# EAGLE board seal belajar (EAGLE 9.5.0)
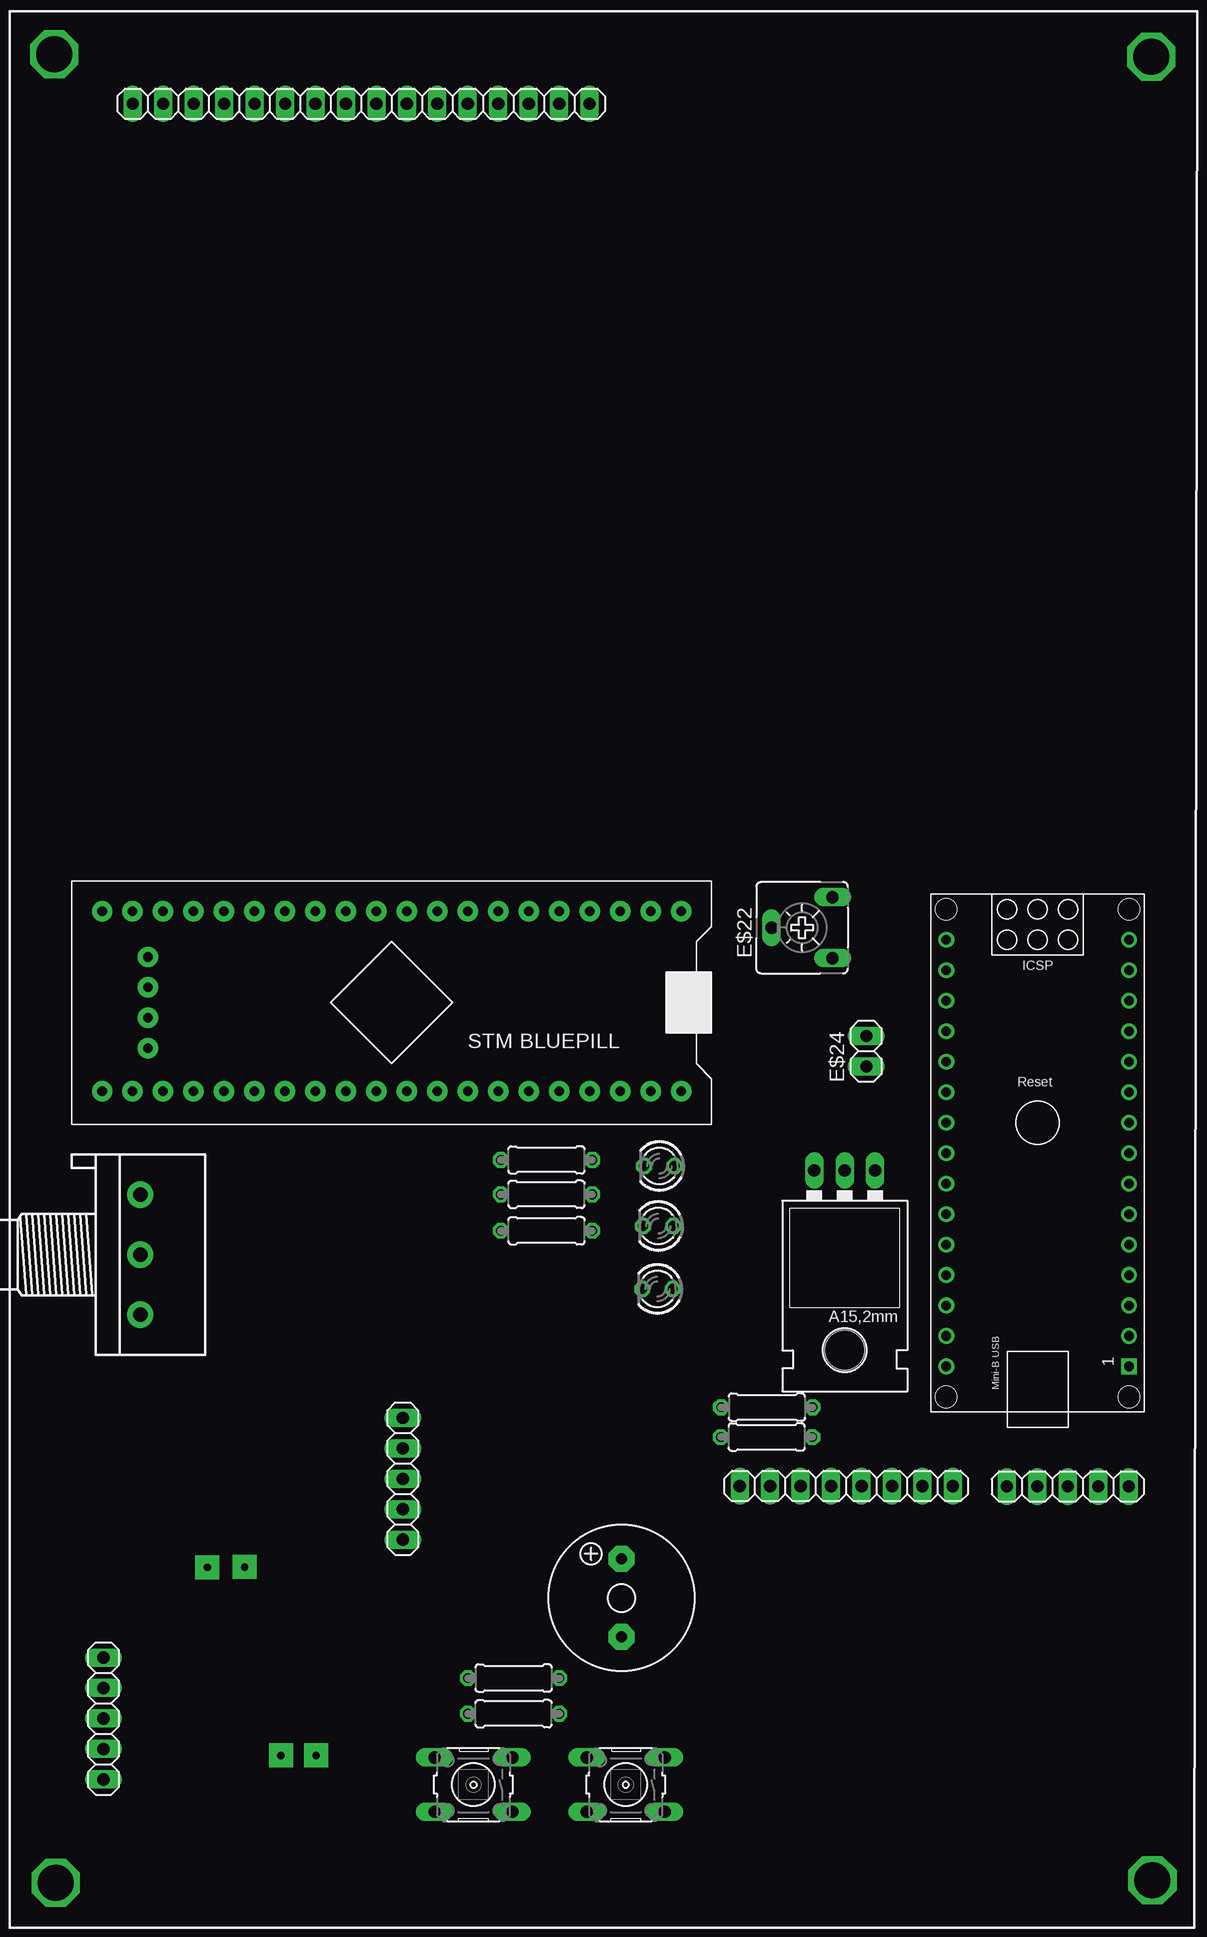
[diagram p0: board, top side]
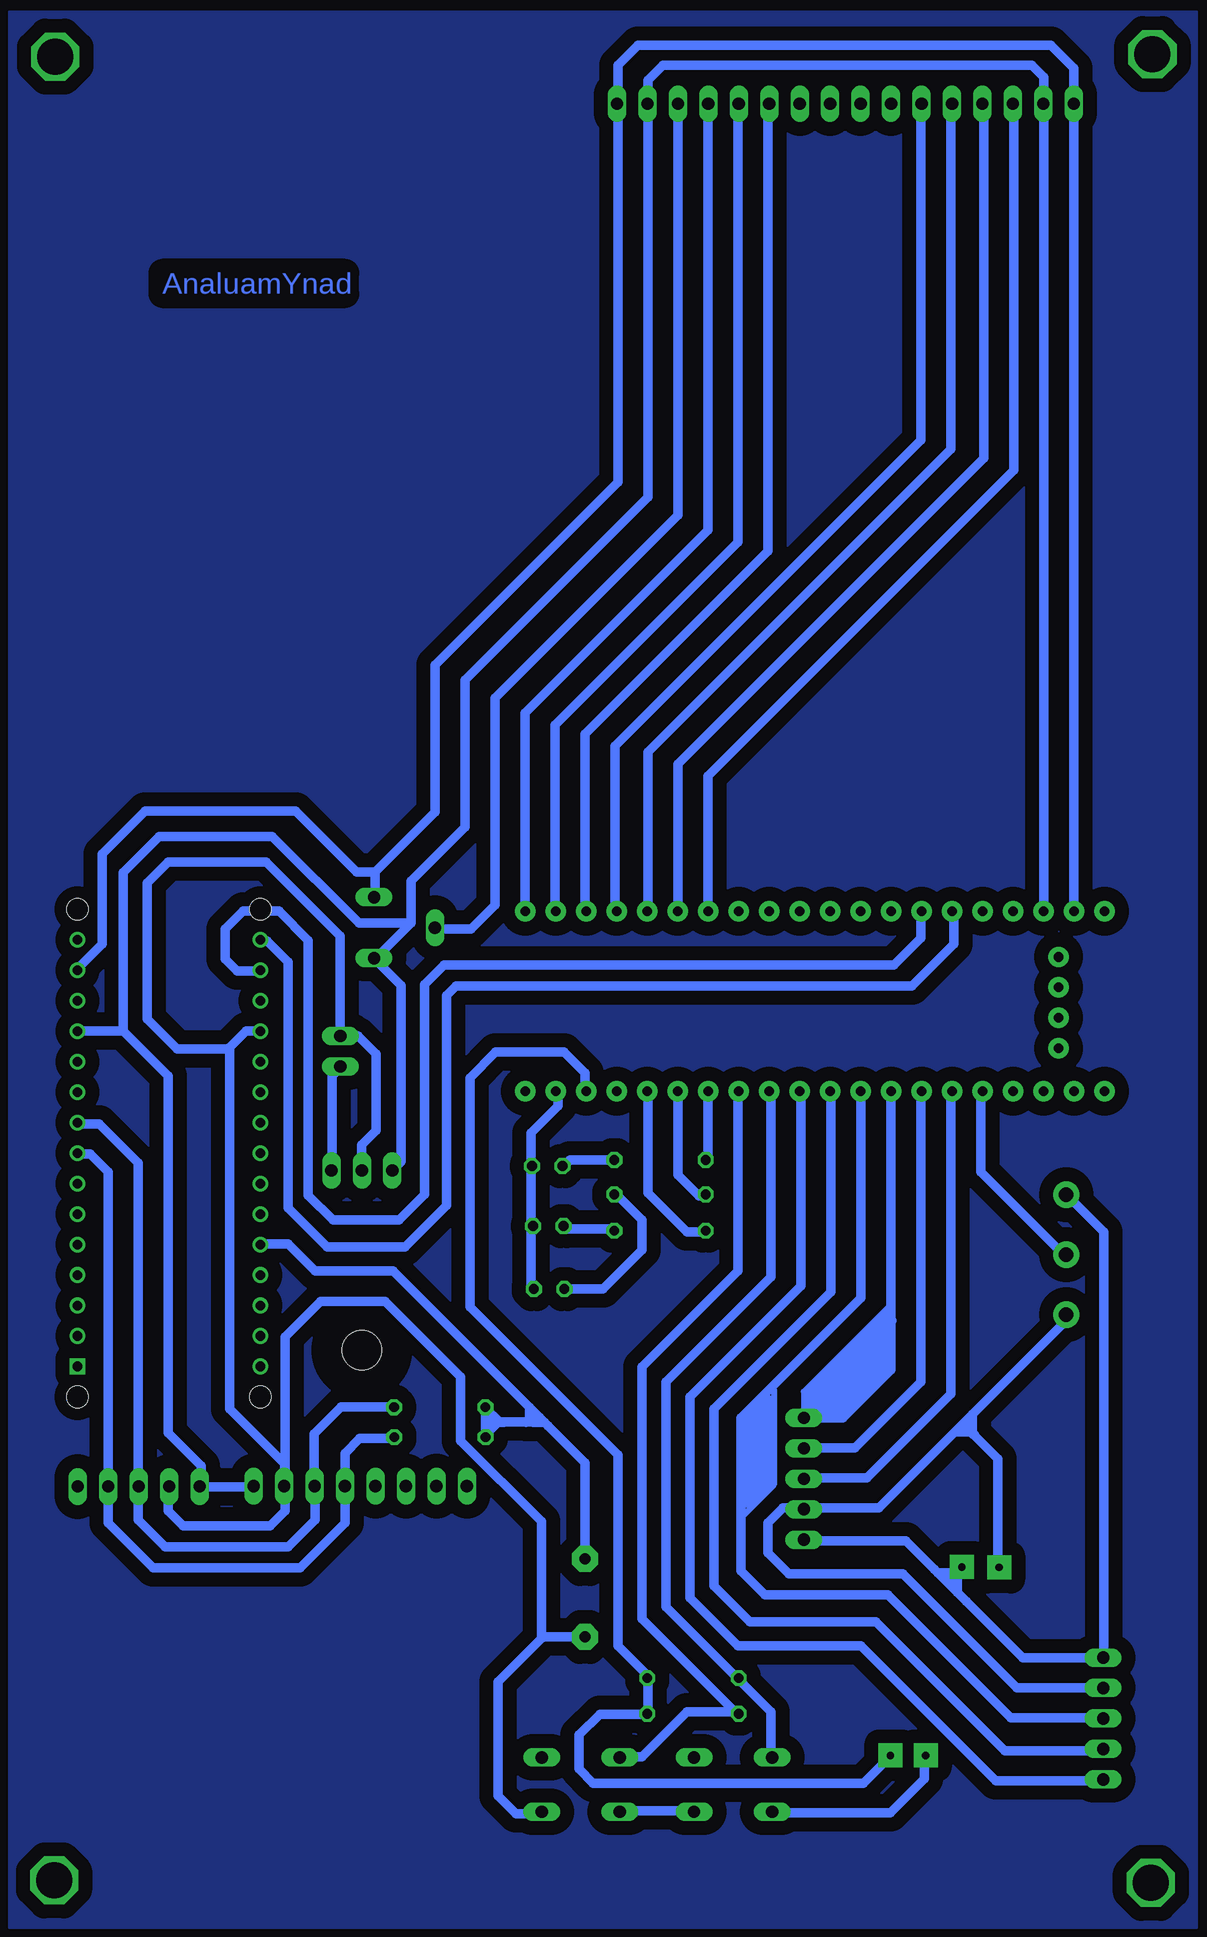
[diagram p1: board, bottom side, seen from below]

No outline drawn. Coordinates in mm, seen from the top.
Copper layers (1*16): Top 0.035mm / dielectric 1.5mm / Bottom 0.035mm
Design rules "default *": minimum track width 6mil, minimum drill 0.35mm, track to track 46mil, track to pad 46mil, pad to pad 6mil, via to via 6mil, smd to smd 6mil, copper to edge 40mil, drill to drill 6mil, minimum pad ring 10mil, minimum via ring 8mil, stop-mask expansion 4mil, vias tented up to drill 0mil, thermal gap 10mil

## Footprints (pad centres in the part's own frame; a part is rotated, then mirrored left to right if it is on the bottom)
STM32F103CB = drill 0.8 pad 1.7: 3.3 -11.43,21.35; 3V3 31.75,6.35; 3V3(1) 27.94,10.16; 5V 26.67,6.35; A0 21.59,21.35; A1 19.05,21.35; A2 16.51,21.35; A3 13.97,21.35; A4 11.43,21.35; A5 8.89,21.35; A6 6.35,21.35; A7 3.81,21.35; A8 -6.35,6.35; A9 -3.81,6.35; A10 -1.27,6.35; A11 1.27,6.35; A12 3.81,6.35; A15 6.35,6.35; B0 1.27,21.35; B1 -1.27,21.35; B3 8.89,6.35; B4 11.43,6.35; B5 13.97,6.35; B6 16.51,6.35; B7 19.05,6.35; B8 21.59,6.35; B9 24.13,6.35; B10 -3.81,21.35; B11 -6.35,21.35; B12 -16.51,6.35; B13 -13.97,6.35; B14 -11.43,6.35; B15 -8.89,6.35; C13 29.21,21.35; C14 26.67,21.35; C15 24.13,21.35; G 29.21,6.35; G1 -16.51,21.35; G2 -13.97,21.35; GND 27.94,17.78; R -8.89,21.35; SWD 27.94,12.7; SWDCLK 27.94,15.24; VB 31.75,21.35
ARDUINO_NANO = drill 0.8 square: 1 -20.32,-7.62 | drill 0.8: 2 -17.78,-7.62; 3 -15.24,-7.62; 4 -12.7,-7.62; 5 -10.16,-7.62; 6 -7.62,-7.62; 7 -5.08,-7.62; 8 -2.54,-7.62; 9 0,-7.62; 10 2.54,-7.62; 11 5.08,-7.62; 12 7.62,-7.62; 13 10.16,-7.62; 14 12.7,-7.62; 15 15.24,-7.62; 16 15.24,7.62; 17 12.7,7.62; 18 10.16,7.62; 19 7.62,7.62; 20 5.08,7.62; 21 2.54,7.62; 22 0,7.62; 23 -2.54,7.62; 24 -5.08,7.62; 25 -7.62,7.62; 26 -10.16,7.62; 27 -12.7,7.62; 28 -15.24,7.62; 29 -17.78,7.62; 30 -20.32,7.62 | hole 1.778: -22.86,-7.62; -22.86,7.62; 17.78,7.62; 17.78,-7.62
1X16 = drill 1.016 long: 1 -19.05,0; 2 -16.51,0; 3 -13.97,0; 4 -11.43,0; 5 -8.89,0; 6 -6.35,0; 7 -3.81,0; 8 -1.27,0; 9 1.27,0; 10 3.81,0; 11 6.35,0; 12 8.89,0; 13 11.43,0; 14 13.97,0; 15 16.51,0; 16 19.05,0
1X05 = drill 1.016 long: 1 -5.08,0; 2 -2.54,0; 3 0,0; 4 2.54,0; 5 5.08,0
3RP/1610N = drill 1.2 pad 2.184: 1 -5,0; 2 0,0; 3 5,0
B3F-10XX = drill 1.016 long: 1 -3.251,2.261; 2 3.251,2.261; 3 -3.251,-2.261; 4 3.251,-2.261
F/QMX = drill 0.914 pad 2.159 octagon: + 3.251,0; - -3.251,0
78XXL = drill 1.016 long: GND 0,-3.81; IN -2.54,-3.81; OUT 2.54,-3.81 | hole 3.302: 0,11.176
LED3MM = drill 0.813 octagon: A -1.27,0; K 1.27,0
0207/7 = drill 0.813 octagon: 1 -3.81,0; 2 3.81,0
1X08 = drill 1.016 long: 1 -8.89,0; 2 -6.35,0; 3 -3.81,0; 4 -1.27,0; 5 1.27,0; 6 3.81,0; 7 6.35,0; 8 8.89,0
CA6V = drill 1.016 long: A -2.54,-2.54; E 2.54,-2.54; S 0,2.54
1X02 = drill 1.016 long: 1 -1.27,0; 2 1.27,0

## Placement (x,y rotation side)
E$1  [STM32F103CB]  171.45,53.34 180 top
E$2  [ARDUINO_NANO]  217.69,29.37 90 top
E$3  [1X16]  161.29,114.3 0 top
E$4  [1X05]  139.8,-20.3 90 top
E$5  [1X05]  164.76,-0.31 90 top
E$6  [3RP/1610N]  142.88,18.36 270 top
E$7  [B3F-10XX]  183.35,-25.81 180 top
E$8  [B3F-10XX]  170.65,-25.81 180 top
E$9  [F/QMX]  183,-10.25 90 top
E$10  [78XXL]  201.6,21.58 180 top
E$11  [LED3MM]  186.15,25.75 180 top
E$12  [LED3MM]  185.99,15.5 180 top
E$13  [LED3MM]  186.06,20.75 180 top
E$14  [0207/7]  195.09,3.16 180 top
E$15  [0207/7]  174,-16.93 180 top
E$16  [0207/7]  174,-19.9 0 top
E$17  [0207/7]  176.74,20.36 0 top
E$18  [0207/7]  176.74,26.26 0 top
E$19  [0207/7]  176.74,23.39 0 top
E$20  [1X08]  201.74,-0.92 180 top
E$21  [1X05]  220.2,-0.96 0 top
E$22  [CA6V]  198.05,45.62 90 top
E$23  [0207/7]  195.11,5.65 180 top
E$24  [1X02]  203.4,35.33 90 top

## Library data of the parts
E$1 = KRI COMPONENT
E$2 = ArduinoNanoV30
E$3-E$5 E$20 E$21 E$24 = Connector
E$6 E$22 = pot
E$7 E$8 = switch-omron
E$9 = buzzer
E$10 = v-reg
E$11-E$13 = led
E$14-E$19 E$23 = resistor

## Tracks (layer width: path | path; a pad name or v marks a point on that pad's centre or on a via)
PLG
  pour Bottom: 132,121.98 231,121.98 231,121.74 231,-37.75 227.92,-37.75 132,-37.75
S$1
  Bottom 0.8: 180.25,114.25 180.25,117.5 178.57,119.18 144.18,119.18 142.25,117.25 142.25,47
S$2
  Bottom 0.8: 144.75,114.25 144.75,116.5 145.75,117.5 176.5,117.5 177.75,116.25 177.75,114.25
S$3
  Bottom 0.8: 172.75,114.5 172.75,78.75 188,63.5 188,47.25
S$4
  Bottom 0.8: 170.25,114.25 170.25,77.75 185.5,62.5 185.5,47
S$5
  Bottom 0.8: 167.75,114.5 167.75,77 183,61.75 183,47
S$6
  Bottom 0.8: 175.25,114.25 175.25,80 190.5,64.75 190.5,47.5 192.5,45.5 195.25,45.5
S$7
  Bottom 0.8: 155,114.25 155,86.25 180.5,60.75 180.5,47
S$8
  Bottom 0.8: 152.5,114.5 152.5,85.5 177.75,60.25 177.75,47
S$9
  Bottom 0.8: 149.75,114.5 149.75,84.75 175.25,59.25 175.25,47
S$10
  Bottom 0.8: 147.25,114.25 147.25,83.75 172.75,58.25 172.75,47.25
S$11
  Bottom 0.8: 200.5,43 197.5,46 | 197.5,46 197.5,49.5 193,54 193,66.25 177.75,81.5 177.75,114 | 215,-1 215,0.75 217.75,3.5 217.75,33.25 221.5,37 | 221.5,37 225.25,37 | 221.5,37 221.5,50.22 218.5,53.22 209.06,53.22 201.84,46 197.5,46
S$12
  Bottom 0.8: 177.75,-20 177.75,-16.75 180.25,-14.25 180.25,1.67 192.6,14.02 192.6,33.11 190.46,35.25 184.75,35.25 183,33.5 183,32
S$13
  Bottom 0.8: 210.75,-1 214.75,-1
S$14
  Bottom 0.8: 208,-1 208,-3 209.25,-4.25 216.5,-4.25 217.75,-3 217.75,-1
S$15
  Bottom 0.8: 220.25,-1 220.25,26 223.5,29.25 225.25,29.25
S$16
  Bottom 0.8: 222.75,-1 222.75,25.25 224.25,26.75 225.25,26.75
S$17
  Bottom 0.8: 220.25,-1.5 220.25,-3.75 218,-6 207.75,-6 205.5,-3.75 205.5,-1
S$18
  Bottom 0.8: 222.75,-1.5 222.75,-4 219,-7.75 206.75,-7.75 203,-4 203,-1
S$19
  Bottom 0.8: 225.25,42.25 223.25,44.25 223.25,51.77 219.68,55.34 207.12,55.34 202.03,50.25 200.5,50.25 | 180.25,113.75 180.25,82.75 195.5,67.5 195.5,55.25 200.5,50.25 | 200.5,50.25 200.5,48.25
S$20
  Bottom 0.8: 155,47 155,44.75 157.25,42.5 194.75,42.5 196.36,40.89 196.36,23.39 198.5,21.25 204,21.25 206.06,23.31 206.06,44.56 208.5,47 211.5,47 213,45.5 213,43 212,42 210.25,42
S$21
  Bottom 0.8: 144.75,47 144.75,114
S$22
  Bottom 0.8: 199.02,25.45 198.34,26.13 198.34,40.8 200.46,42.92
S$23
  Bottom 0.8: 210,19.25 207.75,19.25 205.5,17 199,17 183,1 183,-7
S$24
  Bottom 0.8: 152.25,47 152.25,44.25 155.75,40.75 193.75,40.75 194.55,39.95 194.55,22.45 198,19 204.5,19 207.75,22.25 207.75,42.75 209.5,44.5 210,44.5
S$25
  Bottom 0.8: 204.1,25.19 204.1,33.25 203.41,33.94
S$26
  Bottom 0.8: 139.75,-17.75 147,-17.75 156.5,-8.25 166,-8.25 167.75,-6.5 167.75,-4 166.5,-2.75 165,-2.75
S$27
  Bottom 0.5: 157.67,14.02 164.76,6.93 164.76,4.81
  Bottom 0.8: 161.57,5.43 157.48,9.52 157.48,12.85
  Bottom 0.9: 164.76,4.81 164.16,5.41 161.59,5.41 161.57,5.43 | 157.48,12.85 157.75,13.12 157.75,13.2 164.26,6.69 164.26,5.86 161.87,5.86 157.98,9.75 157.98,12.09 163.53,6.54 | 163.53,6.54 163.71,6.54 | 163.53,6.54 162.39,6.54 158.44,10.49 158.44,10.58
S$28
  Bottom 0.8: 203.41,36.58 203.41,44.91 209.6,51.1 217.73,51.1 219.5,49.33 219.5,38 217,35.5 212.75,35.5 212.61,35.64 | 208,-0.5 208,0.89 | 208,0.89 208,1.18 | 208,0.89 212.61,5.5 212.61,35.64 | 212.61,35.64 211.25,37 210,37
S$29
  Bottom 0.8: 170.5,-16.75 176.25,-11 176.25,7.75 167.5,16.5 167.5,32
S$30
  Bottom 0.8: 143,13.5 143,12.75 150.69,5.06 | 150.69,5.06 158.5,-2.75 164.5,-2.75 | 150.51,3.3 150.69,3.48 150.69,5.06
S$31
  Bottom 0.8: 143,18.25 150,25.25 150,31.75
S$32
  Bottom 0.8: 164.75,-0.25 159.5,-0.25 152.5,6.75 152.5,31.75
S$33
  Bottom 0.8: 164.75,2.25 160.5,2.25 155,7.75 155,32
S$34
  Bottom 0.8: 164.75,4.75 161.5,4.75 157.5,8.75 157.5,32
S$35
  Bottom 0.8: 160,32 160,14.75 170,4.75 170,-2 170,-2.25 170,-8 168,-10 157.75,-10 147.5,-20.25 139.75,-20.25
S$36
  Bottom 0.8: 162.5,32 162.5,15.25 172.25,5.5 172.25,-0.5 172.25,-1 172.25,-9.25 169.25,-12.25 158.75,-12.25 148,-23 139.75,-23
S$37
  Bottom 0.8: 165,32 165,15.75 174.25,6.5 174.25,0.5 174.25,0.25 174.25,-10.25 170.25,-14.25 160,-14.25 148.75,-25.5 139.75,-25.5
S$38
  Bottom 0.8: 170.25,32 170.25,17 178.25,9 178.25,-12 170.25,-20
S$39
  Bottom 0.8: 167.5,-23.5 167.5,-19.75 170.25,-17
S$40
  Bottom 0.8: 175,-28 179,-28
S$41
  Bottom 0.8: 172.75,32 172.75,26.5 173,26.25
S$42
  Bottom 0.8: 175.25,32 175.25,25 173.5,23.25 173,23.25
S$43
  Bottom 0.8: 177.75,32 177.75,23.5 174.5,20.25 172.75,20.25
S$44
  Bottom 0.8: 180.5,20.5 184.5,20.5 184.75,20.75
S$45
  Bottom 0.8: 180.5,23.5 178.25,21.25 178.25,18.75 181.5,15.5 184.75,15.5
S$46
  Bottom 0.8: 180.5,26.25 184.25,26.25 184.75,25.75
S$47
  Bottom 0.8: 187.5,15.5 187.5,25.75
S$48
  Bottom 0.8: 185.25,32 185.25,30.75 187.5,28.5 187.5,25.75
S$49
  Bottom 0.8: 170.25,-19.75 174.5,-19.75 178.25,-23.5 180,-23.5
S$50
  Bottom 0.5: 167.25,7.14 167.25,-0.81 169.84,-3.4 169.84,-1.42 169.69,-1.27
  Bottom 0.9: 169.69,-1.27 169.28,-0.86 169.28,4.62 167.69,6.21 167.69,-0.59 169.35,-2.25 | 169.41,-2.31 169.35,-2.25 | 169.35,-2.25 169.35,-1.62 169.02,-1.29 169.02,3.94 168.46,4.5 | 168.18,4.78 168.46,4.5 | 168.46,4.5 168.46,-0.52
S$51  (via drill 0.6 pad 2)
  other vias: 154.6,-23.38
S$52  (via drill 0.6 pad 2)
  other vias: 157.53,-23.38
S$53  (via drill 0.6 pad 2)
  other vias: 148.47,-7.71
S$54  (via drill 0.6 pad 2)
  other vias: 151.58,-7.67
S$55
  Bottom 0.8: 151.61,-7.71 152.04,-8.14 | 152.67,-8.92 152.67,-8.89 151.92,-8.14 152.04,-8.14 | 152.04,-8.14 153.59,-8.14 153.87,-7.86
S$56
  Bottom 0.8: 151.63,-7.86 151.97,-8.2 151.97,-9.78 | 151.97,-9.78 156.25,-5.5 164.5,-5.5 | 142.75,23.25 139.75,20.25 139.75,-15.25 146.5,-15.25 151.22,-10.53 151.97,-9.78
S$57
  Bottom 0.8: 148.56,-7.69 148.56,1.33 151.33,4.1
S$58
  Bottom 0.8: 150.56,3.34 150.82,3.6 152.14,3.6
S$59
  Bottom 0.8: 154.7,-23.52 154.7,-25.34 157.52,-28.16 167,-28.16
S$60
  Bottom 0.8: 157.58,-23.49 159.77,-25.68 182.33,-25.68 183.5,-24.51 183.5,-21.67 181.76,-19.93 177.99,-19.93
S$61  (via drill 3 pad 4)
  other vias: 135.69,118.44
S$62  (via drill 3 pad 4)
  other vias: 227.17,118.23
S$63  (via drill 3 pad 4)
  other vias: 135.82,-34
S$64  (via drill 3 pad 4)
  other vias: 227.26,-33.79
S$65
  Bottom 0.8: 201.62,25.39 201.62,27.53 200.42,28.73 200.42,35.1 201.91,36.59 203.3,36.59
S$67
  Bottom 0.8: 199.08,5.67 203.33,5.67 205.56,3.44 205.56,-0.16
S$68
  Bottom 0.8: 198.96,3.04 201.77,3.04 203.01,1.8 203.01,0.09
S$69
  Bottom 0.8: 208.02,0.48 208.02,1.2 208.01,1.21 208.01,11.52 205.05,14.48 199.66,14.48 193.36,8.18 193.36,2.86 186.63,-3.87 186.63,-13.63 | 183,-13.5 186.5,-13.5 186.63,-13.63 | 186.63,-13.63 190.25,-17.25 190.25,-26.75 188.75,-28.25 186.75,-28.25
S$70
  Bottom 0.8: 191.28,3.07 191.28,5.6 191.3,5.62
S$71
  Bottom 0.8: 186.79,4.81 187.19,4.41 191.16,4.41
S$72
  Bottom 0.8: 189.74,4.4 190.1,4.4 190.21,4.51 | 191.31,5.61 190.21,4.51 | 190.21,4.51 190.21,4.42 191.25,3.38 191.25,3.07
S$73
  Bottom 0.8: 187.9,4.39 187.62,4.67 187.62,5.63
S$74
  Bottom 0.8: 187.35,4.39 186.38,4.39 186.08,4.09

## Text on the board
Bottom: AnaluamYnad